# EAGLE board Attiny13 (EAGLE 8.2.2)
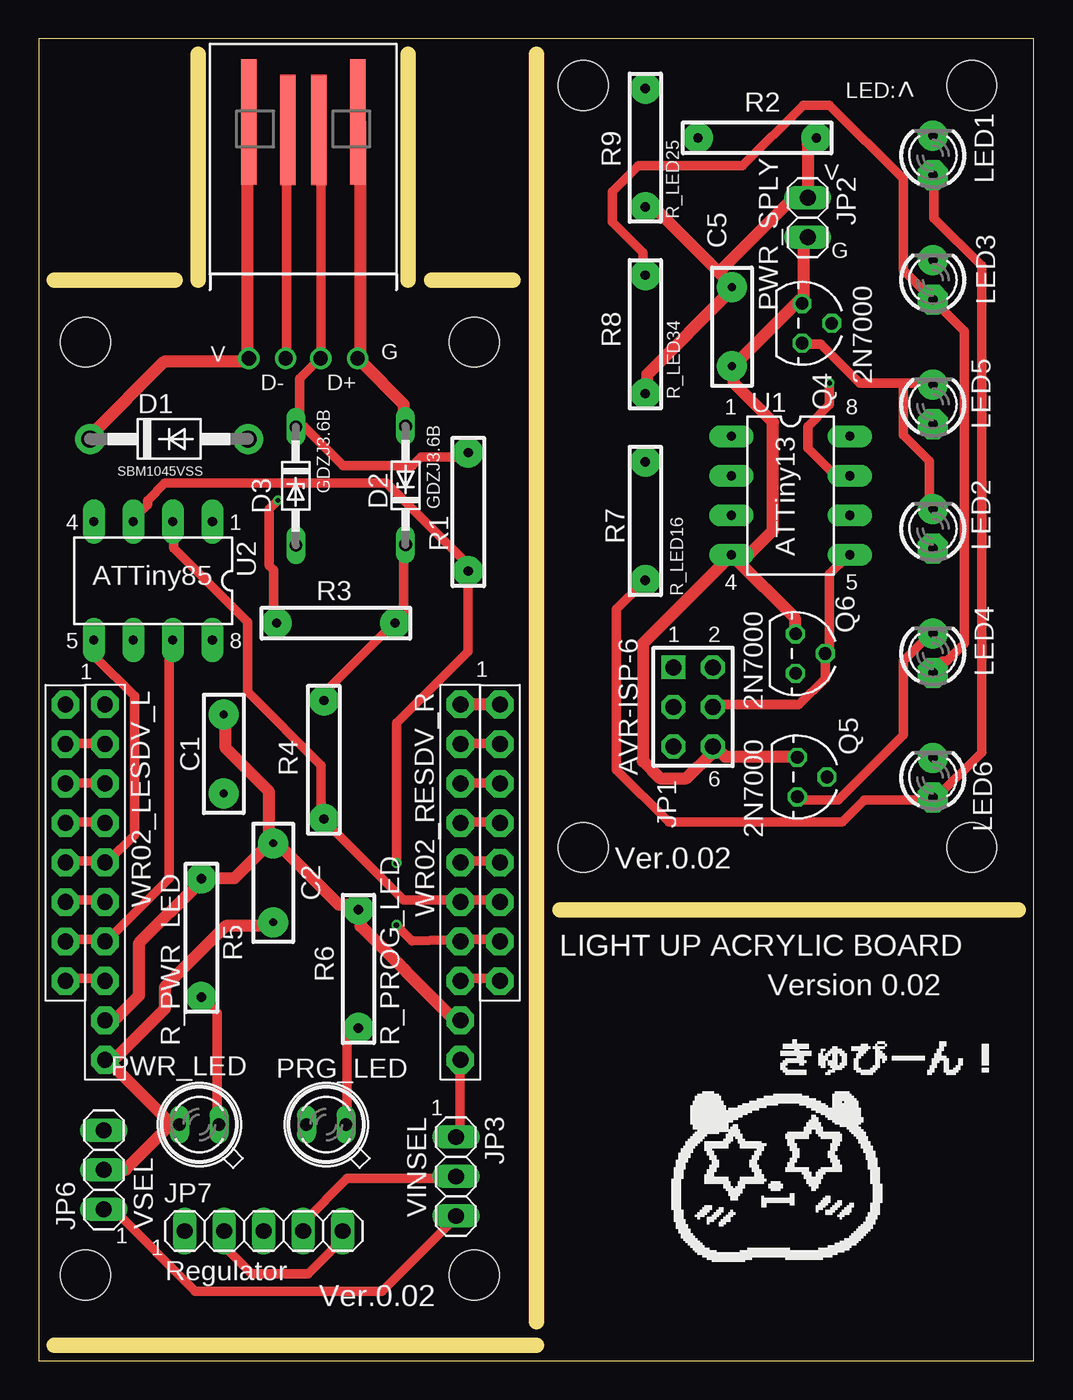
[diagram p0: board, top side]
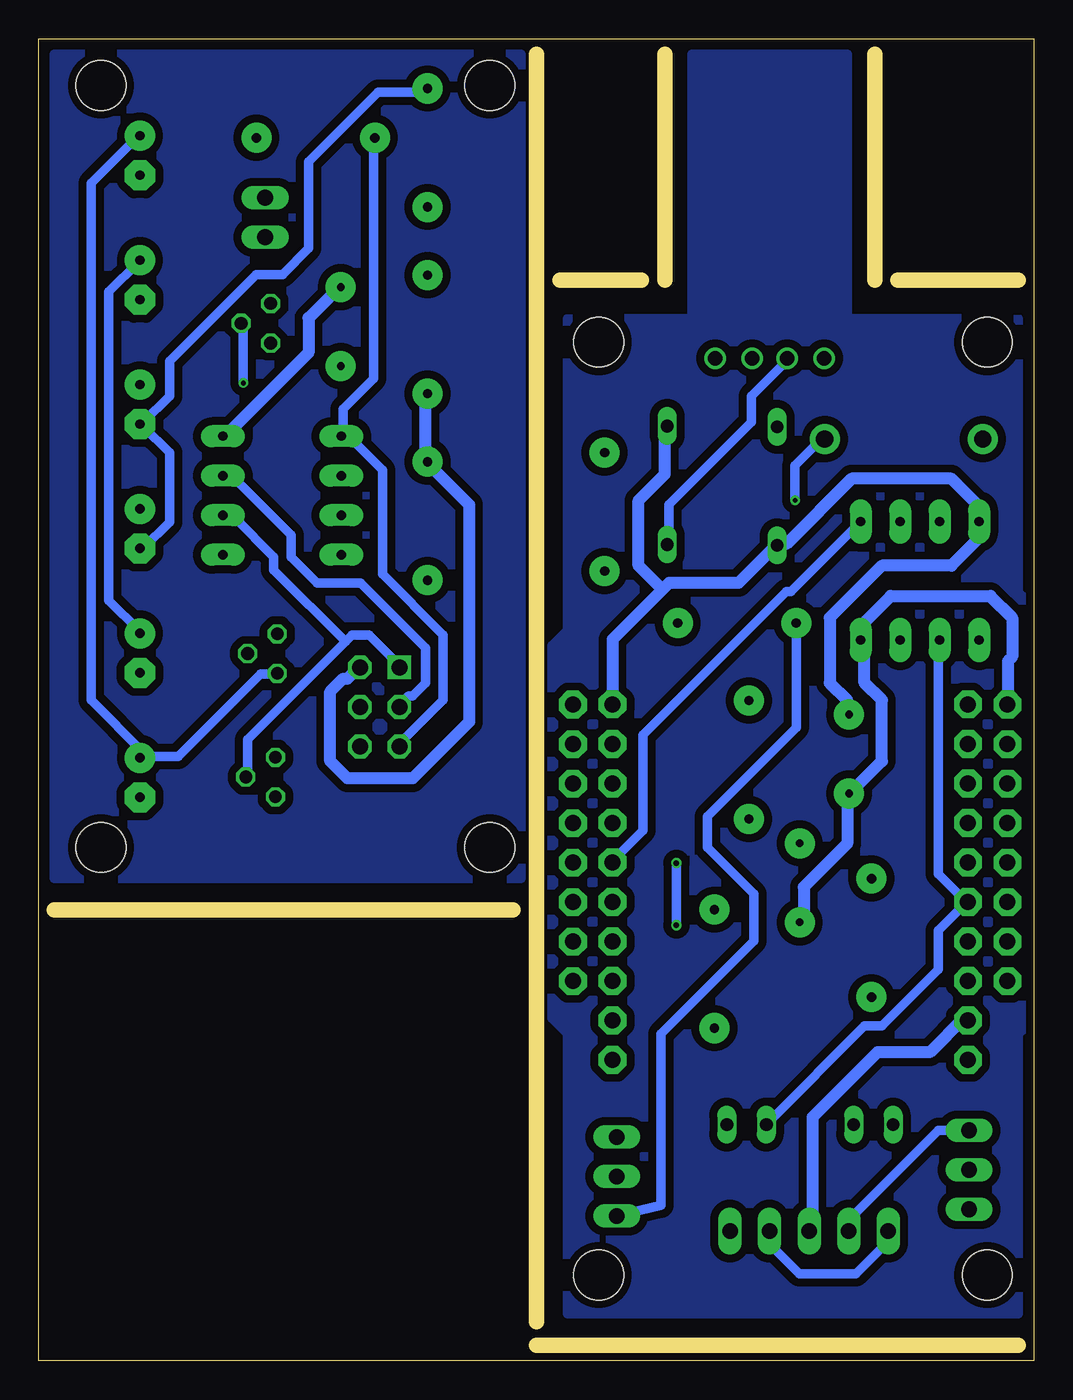
[diagram p1: board, bottom side, seen from below]

Size 64 x 85 mm. Coordinates in mm from the lower left corner, seen from the top.
Outline: 0,0 64,0 64,85 0,85 0,0
Copper layers (1*16): Top 0.035mm / dielectric 1.6mm / Bottom 0.035mm
Design rules "Elecrow_2-layer_PCB_eagle_rule": minimum track width 6mil, minimum drill 12mil, track to track 6mil, track to pad 8mil, pad to pad 12mil, via to via 12mil, smd to smd 0mil, copper to edge 20mil, drill to drill 10mil, minimum pad ring 6mil, minimum via ring 6mil, stop-mask expansion 0mil, vias tented up to drill 100mil, thermal gap 10mil
Net classes: 0 default: width 0.61 mm, clearance 0.508 mm; 1 Power: width 0.762 mm, clearance 0.762 mm
Holes 3.2 mm at 3,65.5 28,65.5 3,5.5 28,5.5 35,82 60,82 60,33 35,33
Milling: 7 lines

## Footprints (pad centres in the part's own frame; a part is rotated, then mirrored left to right if it is on the bottom)
CAP_DIP_2 = drill 0.5 pad 1.93: 1 -2.54,0; 2 2.54,0
DO41-10 = drill 1.118 pad 1.93: A 5.08,0; C -5.08,0
DO34Z7 = drill 0.813 long: A 3.81,0; C -3.81,0
1X10-BIG = drill 1.016 pad 1.778 octagon: 1 -11.43,0; 2 -8.89,0; 3 -6.35,0; 4 -3.81,0; 5 -1.27,0; 6 1.27,0; 7 3.81,0; 8 6.35,0; 9 8.89,0; 10 11.43,0
AVR-ISP-6 = drill 1.016 square: 1 -2.54,-1.27 | drill 1.016 octagon: 2 -2.54,1.27; 3 0,-1.27; 4 0,1.27; 5 2.54,-1.27; 6 2.54,1.27
1X02 = drill 1.016 long: 1 -1.27,0; 2 1.27,0
1X03 = drill 1.016 long: 1 -2.54,0; 2 0,0; 3 2.54,0
1X05 = drill 1.016 long: 1 -5.08,0; 2 -2.54,0; 3 0,0; 4 2.54,0; 5 5.08,0
LED3MM = drill 0.6 pad 1.93 octagon: A -1.27,0 | drill 0.6 pad 1.93: K 1.27,0
SFH480 = drill 0.813 long: A 1.27,0; K -1.27,0
TO-92 = drill 0.813 octagon: 1 -1.27,0; 2 0,1.905; 3 1.27,0
R_0.125W_3 = drill 0.6 pad 1.93: 1 -3.81,0; 2 3.81,0
DIL08 = drill 0.6 pad 1.422 long: 1 -3.81,-3.81; 2 -1.27,-3.81; 3 1.27,-3.81; 4 3.81,-3.81; 5 3.81,3.81; 6 1.27,3.81; 7 -1.27,3.81; 8 -3.81,3.81
USB_MY_BREAKOUT2 = drill 0.914 pad 1.27: D+ 11.29,1.127; D- 11.29,-1.127; GND 11.29,3.5; VBUS 11.29,-3.5
USBA_RAW = smd 1 x 7.1: D+ -1,-1.15; D- 1,-1.15 | smd 1 x 8.08: GND -3.5,-1.66; VBUS 3.5,-1.66
1X08-BIG = drill 1.016 pad 1.778 octagon: 1 -8.89,0; 2 -6.35,0; 3 -3.81,0; 4 -1.27,0; 5 1.27,0; 6 3.81,0; 7 6.35,0; 8 8.89,0

## Placement (x,y rotation side)
C1  0.1uF  [CAP_DIP_2]  11.89,39.02 270 top
C2  4.7uF  [CAP_DIP_2]  15.07,30.73 270 top
C5  0.1uF  [CAP_DIP_2]  44.58,66.49 90 top
D1  SBM1045VSS  [DO41-10]  8.37,59.27 0 top
D2  GDZJ3.6B  [DO34Z7]  23.58,56.29 90 top
D3  GDZJ3.6B  [DO34Z7]  16.52,56.25 270 top
ESDV_L  PINHD-1X10  [1X10-BIG]  4.25,30.77 270 top
ESDV_R  PINHD-1X10  [1X10-BIG]  27.11,30.77 270 top
JP1  AVR-ISP-6  [AVR-ISP-6]  42.08,42.04 270 top
JP2  PWR_SPLY  [1X02]  49.45,73.51 270 top
JP3  VINSEL  [1X03]  26.83,11.84 270 top
JP6  VSEL  [1X03]  4.17,12.27 90 top
JP7  Regulator  [1X05]  14.46,8.33 0 top
LED1  RED  [LED3MM]  57.5,77.5 90 top
LED2  RED  [LED3MM]  57.5,53.5 90 top
LED3  RED  [LED3MM]  57.5,69.5 90 top
LED4  RED  [LED3MM]  57.5,45.5 90 top
LED5  RED  [LED3MM]  57.5,61.5 90 top
LED6  RED  [LED3MM]  57.5,37.5 90 top
LED8  PRG_LED  [SFH480]  18.48,15.18 180 top
LED9  PWR_LED  [SFH480]  10.32,15.18 180 top
Q4  2N7000  [TO-92]  49.09,66.71 270 top
Q5  2N7000  [TO-92]  48.79,37.53 270 top
Q6  2N7000  [TO-92]  48.67,45.47 270 top
R1  68R  [R_0.125W_3]  27.62,54.58 90 top
R2  4K7  [R_0.125W_3]  46.2,78.64 0 top
R3  1K5  [R_0.125W_3]  19.1,47.43 180 top
R4  68R  [R_0.125W_3]  18.33,38.64 90 top
R5  R_PWR_LED  [R_0.125W_3]  10.45,27.19 270 top
R6  R_PROG_LED  [R_0.125W_3]  20.55,25.19 90 top
R7  R_LED16  [R_0.125W_3]  39,54 270 top
R8  R_LED34  [R_0.125W_3]  39,66 90 top
R9  R_LED25  [R_0.125W_3]  39,78 90 top
U1  ATTiny13  [DIL08]  48.35,55.64 270 top
U2  ATTiny85  [DIL08]  7.34,50.15 180 top
U$2  USB_MY_BREAKOUTPATTERN2  [USB_MY_BREAKOUT2]  17,75.75 270 top
USB1  USBA_RAW  [USBA_RAW]  17,78 180 top
WR02_L  WR02_L  [1X08-BIG]  1.71,33.3 270 top
WR02_R  WR02_R  [1X08-BIG]  29.65,33.3 270 top

## Library data of the parts
C1 C2 C5 R1-R9 = MyLib
D1 ESDV_L ESDV_R LED8 LED9 WR02_L WR02_R = adafruit
D2 D3 = diode
JP1 U1 U2 = atmel
JP2 JP3 JP6 JP7 = pinhead
LED1-LED6 = led
Q4-Q6 = transistors
U$2 USB1 = MyParts

## Nets
+5V [Power]: C1.2 C2.2 ESDV_L.10 JP6.2 LED9.A U2.8 WR02_L.1
AGND [Power]: C1.1 C2.1 D2.A D3.A ESDV_L.9 ESDV_R.1 ESDV_R.9 JP7.3 R5.1 R6.2 U2.4 U$2.GND USB1.GND WR02_R.1
GND [Power]: C5.1 JP1.6 JP2.2 Q4.1 Q5.1 Q6.1 U1.4
N$1 [Power]: D1.C U$2.VBUS USB1.VBUS
N$2: JP1.3 Q4.2 U1.7
N$3: ESDV_R.6 R4.1 U2.2 WR02_R.6
N$4: D2.C R3.1 R4.2 U$2.D- USB1.D-
N$5: LED1.K LED6.K Q6.3
N$6: JP1.4 Q6.2 U1.5
N$7: JP1.5 R2.1 U1.1
N$8: JP1.1 Q5.2 U1.6
N$9: LED2.K LED5.K Q4.3
N$10: LED3.K LED4.K Q5.3
N$11: ESDV_R.7 R1.1 U2.3 WR02_R.7
N$12: ESDV_R.5 U2.1 WR02_R.5
N$13: LED9.K R5.2
N$14: LED8.K R6.1
N$15: ESDV_L.6 LED8.A U2.6 WR02_L.6
N$16: ESDV_L.5 U2.5 WR02_L.5
N$17: JP3.2 JP7.1 JP7.4
N$18: ESDV_L.7 U2.7 WR02_L.7
N$19: D3.C R1.2 U$2.D+ USB1.D+
N$20: ESDV_R.10 JP3.1
N$21: ESDV_L.2 WR02_L.2
N$22: ESDV_L.3 WR02_L.3
N$23: ESDV_L.4 WR02_L.4
N$24: ESDV_L.8 WR02_L.8
N$25: ESDV_R.2 WR02_R.2
N$26: JP6.3 JP7.2 JP7.5
N$27: ESDV_R.3 WR02_R.3
N$28: ESDV_R.4 WR02_R.4
N$29: ESDV_R.8 WR02_R.8
N$30: LED1.A LED6.A R7.2
N$31: LED3.A LED4.A R8.2
N$32: LED2.A LED5.A R9.2
VCC [Power]: C5.2 JP1.2 JP2.1 R2.2 R7.1 R8.1 R9.1 U1.8
VDD: D1.A JP3.3 JP6.1 R3.2

## Tracks (layer width: path | path; a pad name or v marks a point on that pad's centre or on a via)
+5V
  Top 0.762: 8.38,15.37 8.94,15.37 LED9.A | 8.38,15.37 4.47,19.28 ESDV_L.10 4.75,19.56 5.03,19.56 8.1,22.63 8.1,24.03 12.01,27.94 14.81,27.94 C2.2 | JP6.2 4.19,12.29 5.59,12.29 8.38,15.09 8.38,15.37
  Bottom 0.762: WR02_L.1 1.68,42.47 1.68,44.98 1.4,45.26 1.4,47.78 2.79,49.17 9.22,49.17 11.18,47.22 11.18,46.66 U2.8 10.9,46.1 10.9,43.59 9.78,42.47 9.78,38.56 11.73,36.6 C1.2 12.01,36.32 12.01,33.25 14.81,30.45 14.81,28.22 C2.2
AGND
  Top 0.762: ESDV_R.9 27.1,22.07 26.54,22.07 20.68,27.94 20.68,28.78 R6.2 20.4,29.34 19.28,29.34 15.37,33.25 C2.1 | C2.1 14.81,33.25 12.57,31.01 10.62,31.01 R5.1 10.34,30.73 6.43,26.82 6.43,23.47 5.03,22.07 4.47,22.07 ESDV_L.9 | C1.1 12.01,41.35 12.01,39.4 14.81,36.6 14.81,33.53 C2.1 | D2.A 23.47,60.35 23.47,61.47 20.68,64.26 U$2.GND 20.68,64.82 20.68,79.63 USB1.GND | ESDV_R.1 27.38,42.19 29.62,42.19 WR02_R.1
  Bottom 0.762: JP7.3 14.25,8.38 14.25,15.65 10.06,19.84 6.71,19.84 4.47,22.07 ESDV_L.9 | 23.89,49.59 23.47,50.01 19,50.01 16.76,52.25 D3.A 16.48,52.53 15.93,52.53 11.73,56.72 5.31,56.72 3.63,55.04 3.63,54.2 U2.4 3.63,53.65 3.63,52.81 5.31,51.13 9.78,51.13 13.13,47.78 13.13,43.59 12.01,42.47 12.01,41.63 C1.1 | 23.89,49.59 27.1,46.38 27.1,42.47 ESDV_R.1 | 23.89,49.59 25.43,51.13 25.43,55.32 23.75,57 23.75,60.07 D2.A
GND
  Top 0.762: JP2.2 49.17,72.08 49.17,68.17 Q4.1 48.9,68.17 44.7,63.98 C5.1 44.7,63.7 44.7,62.87 47.22,60.35 47.22,53.37 45.26,51.41 U1.4 | Q5.1 48.62,38.84 44.15,38.84 43.59,39.4 JP1.6 43.31,39.12 41.63,37.44 39.95,37.44 38.84,38.56 38.84,46.1 44.42,51.69 U1.4 | Q6.1 48.62,46.94 48.62,47.78 44.7,51.69 U1.4
N$1
  Top 0.762: D1.C 3.35,59.51 8.1,64.26 13.41,64.26 U$2.VBUS 13.41,64.82 13.41,79.63 USB1.VBUS
N$2  (via drill 0.3)
  Top 0.61: v50.85,62.87 50.85,61.47 49.45,60.07 49.45,58.67 51.13,57 51.97,57 U1.7
  Bottom 0.61: v50.85,62.87 50.85,66.5 Q4.2 | JP1.3 40.79,42.19 40.23,42.75 39.95,42.75 39.12,43.59 39.12,45.82 43.31,50.01 46.1,50.01 47.78,51.69 47.78,53.09 51.41,56.72 51.97,56.72 U1.7
N$3
  Top 0.61: WR02_R.6 29.62,29.62 27.38,29.62 ESDV_R.6 27.1,29.62 23.47,29.62 18.44,34.65 R4.1 18.16,34.92 18.16,38.28 13.41,43.03 13.41,47.5 8.66,52.25 8.66,53.92 U2.2
N$4
  Top 0.61: D2.C 23.47,52.25 23.47,48.06 22.91,47.5 R3.1 22.63,47.22 18.44,43.03 18.44,42.47 R4.2 | U$2.D- 15.93,64.54 15.93,79.07 USB1.D-
  Bottom 0.61: D2.C 23.47,52.53 23.47,55.04 18.16,60.35 18.16,62.03 15.93,64.26 U$2.D-
N$5
  Bottom 0.61: Q6.3 48.9,44.15 49.73,44.15 55.04,38.84 57.28,38.84 LED6.K 57.28,39.12 60.63,42.47 60.63,75.72 57.84,78.51 57.56,78.51 LED1.K
N$6
  Top 0.61: U1.5 51.97,51.69 50.85,50.57 50.85,45.54 Q6.2 50.57,45.26 50.57,43.87 48.9,42.19 43.59,42.19 JP1.4
N$7
  Bottom 0.61: R2.1 42.47,78.51 42.47,63.14 44.42,61.19 44.42,59.51 U1.1 44.15,59.51 41.91,57.28 41.91,50.57 38,46.66 38,42.47 40.79,39.67 JP1.5
N$8
  Bottom 0.61: 44.28,46.24 43.87,46.66 42.75,46.66 40.79,44.7 JP1.1 | 44.28,46.24 50.57,39.95 50.57,37.72 Q5.2 | 44.28,46.24 48.9,50.85 48.9,51.69 51.41,54.2 51.97,54.2 U1.6
N$9
  Top 0.61: 55.6,62.87 57.28,62.87 LED5.K | 55.6,62.87 52.81,62.87 50.29,65.38 49.17,65.38 Q4.3 | 55.6,62.87 55.6,59.51 57.28,57.84 57.28,55.04 LED2.K
N$10
  Top 0.61: Q5.3 48.9,36.04 51.41,36.04 55.6,40.23 55.6,44.98 57.28,46.66 LED4.K
  Bottom 0.61: LED3.K 57.56,70.69 59.51,68.73 59.51,48.9 57.56,46.94 LED4.K
N$11  (via drill 0.35)
  Top 0.61: 27.38,27.1 29.62,27.1 WR02_R.7 | 27.38,27.1 ESDV_R.7 | U2.3 6.15,54.2 6.99,55.04 6.99,55.32 8.1,56.44 22.35,56.44 27.38,51.41 27.38,50.85 R1.1 27.62,45.62 23,41 v23,32 | v23,28 24,27 27.38,27.1
  Bottom 0.61: 29.9,27.1 WR02_R.7 | v23,32 v23,28
N$12
  Top 0.61: WR02_R.5 29.62,32.13 27.38,32.13 ESDV_R.5
  Bottom 0.61: U2.1 11.18,53.92 15.65,49.45 15.93,49.45 25.15,40.23 25.15,34.09 27.1,32.13 ESDV_R.5
N$13
  Top 0.61: LED9.K 11.46,15.37 11.46,22.35 10.62,23.19 R5.2
N$14
  Top 0.61: LED8.K 19.84,15.37 19.84,20.68 20.4,21.23 R6.1
N$15
  Top 0.61: WR02_L.6 1.96,29.62 4.19,29.62 ESDV_L.6
  Bottom 0.61: LED8.A 17.04,15.37 10.9,21.51 9.78,21.51 6.15,25.15 6.15,27.66 4.47,29.34 ESDV_L.6 4.47,29.62 6.15,31.29 6.15,46.1 U2.6
N$16
  Top 0.61: U2.5 3.63,46.1 3.63,45.26 6.15,42.75 6.15,33.81 4.47,32.13 ESDV_L.5 4.19,32.13 1.96,32.13 WR02_L.5
N$17
  Top 0.61: JP3.2 26.82,11.73 19.84,11.73 17.04,8.94 17.04,8.38 JP7.4
  Bottom 0.61: JP7.1 9.5,8.1 9.5,7.54 11.46,5.59 15.09,5.59 16.76,7.26 16.76,8.1 JP7.4
N$18
  Top 0.61: U2.7 8.38,46.1 8.38,31.01 4.47,27.1 ESDV_L.7 4.19,27.1 1.96,27.1 WR02_L.7
N$19
  Top 0.61: R1.2 27.38,58.12 24.59,58.12 24.03,57.56 19.56,57.56 17.04,60.07 D3.C 16.76,60.07 16.76,63.14 17.88,64.26 U$2.D+ 18.16,64.54 18.16,79.07 USB1.D+
N$20
  Top 0.61: JP3.1 27.1,14.53 27.1,19.28 ESDV_R.10
N$21
  Top 0.61: WR02_L.2 1.96,39.67 4.19,39.67 ESDV_L.2
N$22
  Top 0.61: WR02_L.3 1.96,37.16 4.19,37.16 ESDV_L.3
N$23
  Top 0.61: WR02_L.4 1.96,34.65 4.19,34.65 ESDV_L.4
N$24
  Top 0.61: WR02_L.8 1.96,24.59 4.19,24.59 ESDV_L.8
N$25
  Top 0.61: WR02_R.2 29.62,39.67 27.38,39.67 ESDV_R.2
N$26
  Top 0.61: JP7.2 12.01,8.1 12.01,7.26 13.69,5.59 17.32,5.59 19.28,7.54 19.28,8.1 JP7.5
  Bottom 0.61: JP6.3 4.19,14.81 6.15,14.81 11.73,9.22 11.73,8.38 JP7.2
N$27
  Top 0.61: WR02_R.3 29.62,37.16 27.38,37.16 ESDV_R.3
N$28
  Top 0.61: WR02_R.4 29.62,34.65 27.38,34.65 ESDV_R.4
N$29
  Top 0.61: WR02_R.8 29.62,24.59 27.38,24.59 ESDV_R.8
N$30
  Top 0.61: R7.2 38.84,50.01 37.16,48.34 37.16,38 40.51,34.65 51.69,34.65 53.09,36.04 57.28,36.04 LED6.A 57.56,36.04 60.63,39.12 60.63,70.41 57.56,73.48 57.56,76 LED1.A
N$31
  Top 0.61: R8.2 38.84,69.85 38.84,71.25 36.88,73.2 36.88,75.16 38.56,76.83 45.26,76.83 49.17,80.75 50.85,80.75 55.6,76 55.6,70.13 LED3.A 59.51,66.22 59.51,46.1 58.4,44.98 58.12,44.98 57.56,44.42 LED4.A
N$32
  Bottom 0.61: LED2.A 57.28,52.25 55.6,53.92 55.6,58.4 57.28,60.07 LED5.A 57.28,60.35 55.6,62.03 55.6,64.26 50.01,69.85 48.34,69.85 46.66,71.53 46.66,77.11 42.19,81.58 39.12,81.58 R9.2
N$33
  pour Bottom: 1,67 12,67 12,84 22,84 22,67 30,67 30,47 31,46 31,44 31,22 30,21 30,20 30,3 1,3 1,21 0.6,21.4 0.6,23.2 0.6,49 1,49.4
N$34
  pour Bottom: 33,84 63,84 63,31 33,31
VCC
  Top 0.762: R2.2 49.73,78.51 49.45,78.23 49.45,74.88 JP2.1 49.17,74.6 48.34,74.6 43.73,69.99 | 43.73,69.99 44.42,69.29 C5.2 44.42,68.73 39.12,63.42 39.12,62.31 R8.1 | 43.73,69.99 39.67,74.04 39.12,74.04 R9.1
  Bottom 0.762: JP1.2 43.59,44.42 44.15,43.87 44.42,43.87 45.26,43.03 45.26,38.56 44.15,37.44 39.95,37.44 36.32,41.07 36.32,55.04 38.84,57.56 R7.1 39.12,58.12 39.12,62.03 R8.1 | U1.8 51.97,59.51 46.66,64.82 46.66,67.06 44.7,69.01 C5.2
VDD  (via drill 0.3)
  Top 0.61: v15.37,55.32 14.81,54.76 14.81,51.13 15.09,50.85 15.09,47.5 R3.2 15.37,47.22 | JP6.1 4.19,9.5 5.03,9.5 10.06,4.47 22.07,4.47 26.82,9.22 JP3.3
  Bottom 0.61: v15.37,55.32 15.37,57.56 13.69,59.23 D1.A | R3.2 15.29,40.71 21,35 21,33 18,30 18,27 24,21 24,10 JP3.3

## Text on the board
tNames: LED: | > | V | G | V | G | D- | D+ | 1 | 8 | 4 | 1 | 4 | 5 | 5 | 8 | 1 | 2 | 1 | 1 | 6 | Ver.0.02 | LIGHT UP ACRYLIC BOARD | Version 0.02 | 1 | 1 | 1 | Ver.0.02